# Allegro board mbseq03.brd
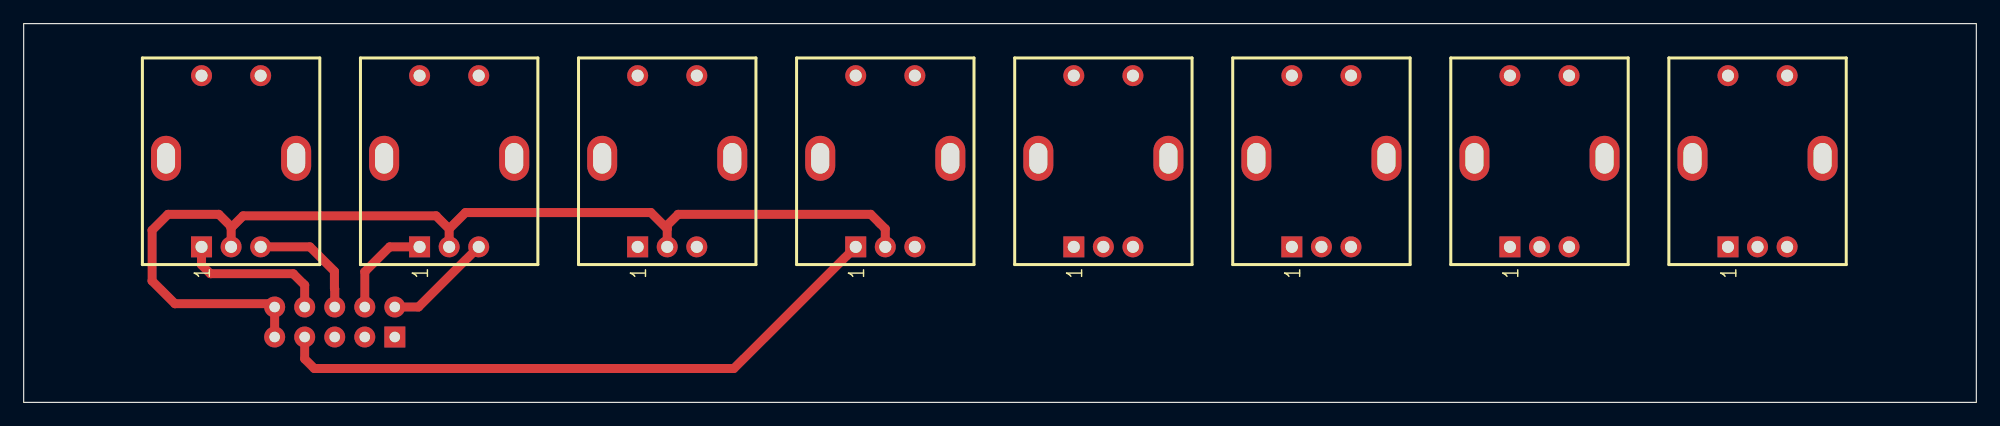
[diagram p0: board, top side]
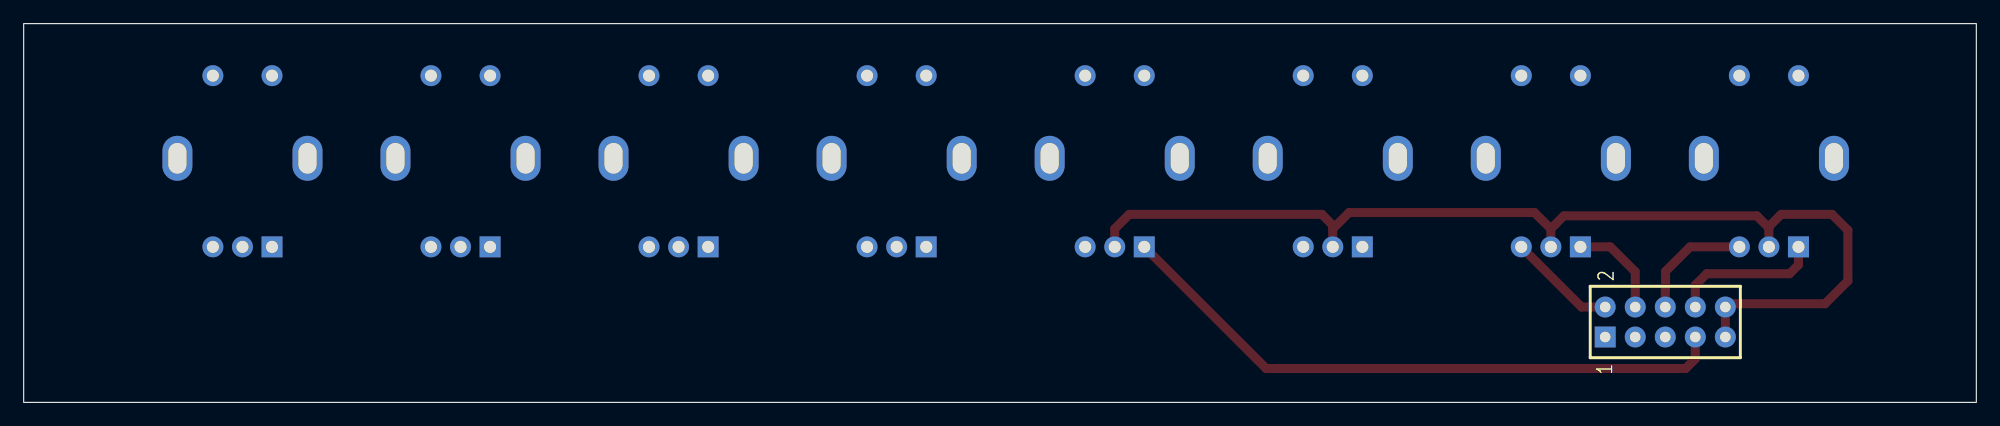
[diagram p1: board, bottom side, seen from below]

Outline 165.1 x 32.08 mm; copper layers: TOP, BOTTOM. Coordinates in mm from the lower left corner of the outline.
Outline path: rectangle 0,0 165.1,32.08

## Placement (name value [footprint] x y rotation side)
J1  534206-5  [CONN-AMP-2X5PIN-100MIL-ST]  31.38 5.54 180 bottom
S1  EC11E15244  [SWITCH-EC11E15244]  17.54 20.42 90 top
S2  EC11E15244  [SWITCH-EC11E15244]  35.98 20.42 90 top
S3  EC11E15244  [SWITCH-EC11E15244]  54.41 20.42 90 top
S4  EC11E15244  [SWITCH-EC11E15244]  72.85 20.42 90 top
S5  EC11E15244  [SWITCH-EC11E15244]  91.29 20.42 90 top
S6  EC11E15244  [SWITCH-EC11E15244]  109.73 20.42 90 top
S7  EC11E15244  [SWITCH-EC11E15244]  128.16 20.42 90 top
S8  EC11E15244  [SWITCH-EC11E15244]  146.6 20.42 90 top

## Library data of the parts
J1 = J_2X5_ST_AMP_534206: part number: J_2X5_ST_AMP_534206-10016967,534206-5,CONN-AMP-2X5PIN-100MIL-ST
S1-S8 = S_EC11B: part number: S_EC11B-10018475,EC11E15244,SWITCH-EC11E15244

## Footprints (pads in the part's own frame, mm; a bottom-side part is the same pattern mirrored in y, then rotated)
CONN-AMP-2X5PIN-100MIL-ST
  rect 1.778x1.778 hole 0.889: 1(0,0)
  round 1.778 hole 0.889: 2(0,2.54) 3(2.54,0) 4(2.54,2.54) 5(5.08,0) 6(5.08,2.54) 7(7.62,0) 8(7.62,2.54) 9(10.16,0) 10(10.16,2.54)
SWITCH-EC11E15244
  oval 3.81x2.54 hole 2.591x1.524: (0.25,5.5) (0.25,-5.5)
  rect 1.778x1.778 hole 1.016: 1(-7.25,2.5)
  round 1.778 hole 1.016: 2(-7.25,-2.5) 3(-7.25,0) 4(7.25,2.5) 5(7.25,-2.5)

## Nets
UNNAMED_1_J2X5ST_I10_1: J1.1 S3.2(B)
UNNAMED_1_J2X5ST_I10_2: J1.2 S2.2(B)
UNNAMED_1_J2X5ST_I10_3: J1.3 S3.1(A)
UNNAMED_1_J2X5ST_I10_4: J1.4 S2.1(A)
UNNAMED_1_J2X5ST_I10_5: J1.5 S4.2(B)
UNNAMED_1_J2X5ST_I10_6: J1.6 S1.2(B)
UNNAMED_1_J2X5ST_I10_7: J1.7 S4.1(A)
UNNAMED_1_J2X5ST_I10_8: J1.8 S1.1(A)
UNNAMED_1_J2X5ST_I10_10: J1.9 J1.10 S1.3(C) S2.3(C) S3.3(C) S4.3(C)
UNNAMED_1_J2X5ST_I11_1: S7.2(B)
UNNAMED_1_J2X5ST_I11_2: S6.2(B)
UNNAMED_1_J2X5ST_I11_3: S7.1(A)
UNNAMED_1_J2X5ST_I11_4: S6.1(A)
UNNAMED_1_J2X5ST_I11_5: S8.2(B)
UNNAMED_1_J2X5ST_I11_6: S5.2(B)
UNNAMED_1_J2X5ST_I11_7: S8.1(A)
UNNAMED_1_J2X5ST_I11_8: S5.1(A)
UNNAMED_1_J2X5ST_I11_10: S5.3(C) S6.3(C) S7.3(C) S8.3(C)

Pads without a net: S1 4 5; S2 4 5; S3 4 5; S4 4 5; S5 4 5; S6 4 5; S7 4 5; S8 4 5

## Routing (per net, layer and track width the routed paths; a pad name or vN(x,y) marks a point on that pad's centre or on a via; arc(x,y) is an arc through that point)
UNNAMED_1_J2X5ST_I10_2: length 9.2
  TOP w0.762: J1.2 33.38,8.08 S2.2
UNNAMED_1_J2X5ST_I10_4: length 8.5
  TOP w0.762: J1.4 28.84,11.06 30.95,13.17 S2.1
UNNAMED_1_J2X5ST_I10_6: length 10.1
  TOP w0.762: S1.2 24.2,13.17 26.28,11.1 26.28,9.63 26.3,9.6 J1.6
UNNAMED_1_J2X5ST_I10_7: length 53
  TOP w0.762: J1.7 23.76,3.68 24.57,2.87 60.05,2.87 S4.1
UNNAMED_1_J2X5ST_I10_8: length 12.8
  TOP w0.762: S1.1 15.04,11.65 15.79,10.9 22.8,10.9 23.76,9.93 J1.8
UNNAMED_1_J2X5ST_I10_10: length 90.6
  TOP w0.762: 17.54,14.78 17.54,14.88 16.5,15.93 12.2,15.93 10.86,14.58 10.86,10.29 12.79,8.36 20.94,8.36 J1.10 J1.9 ; 17.54,14.78 S1.3 ; 17.54,14.78 18.55,15.8 34.87,15.8 35.98,14.7 ; S4.3 72.85,14.7 71.62,15.93 55.33,15.93 54.41,15.01 54.41,14.7 ; 35.98,14.7 S2.3 ; 35.98,14.7 37.36,16.08 53.03,16.08 54.41,14.7 ; S3.3 54.41,14.7
